# Altium PCB JPPCCCC.PCBDOC (part 2 of 2)
Units mm, origin at the board's own origin, x right, y up, seen from the top; angles counter-clockwise.
Board outline 108.84 x 93.85 mm, 2 copper layers (Top Layer, Bottom Layer); 131 components, 71 nets, 555 pads, 84 vias.
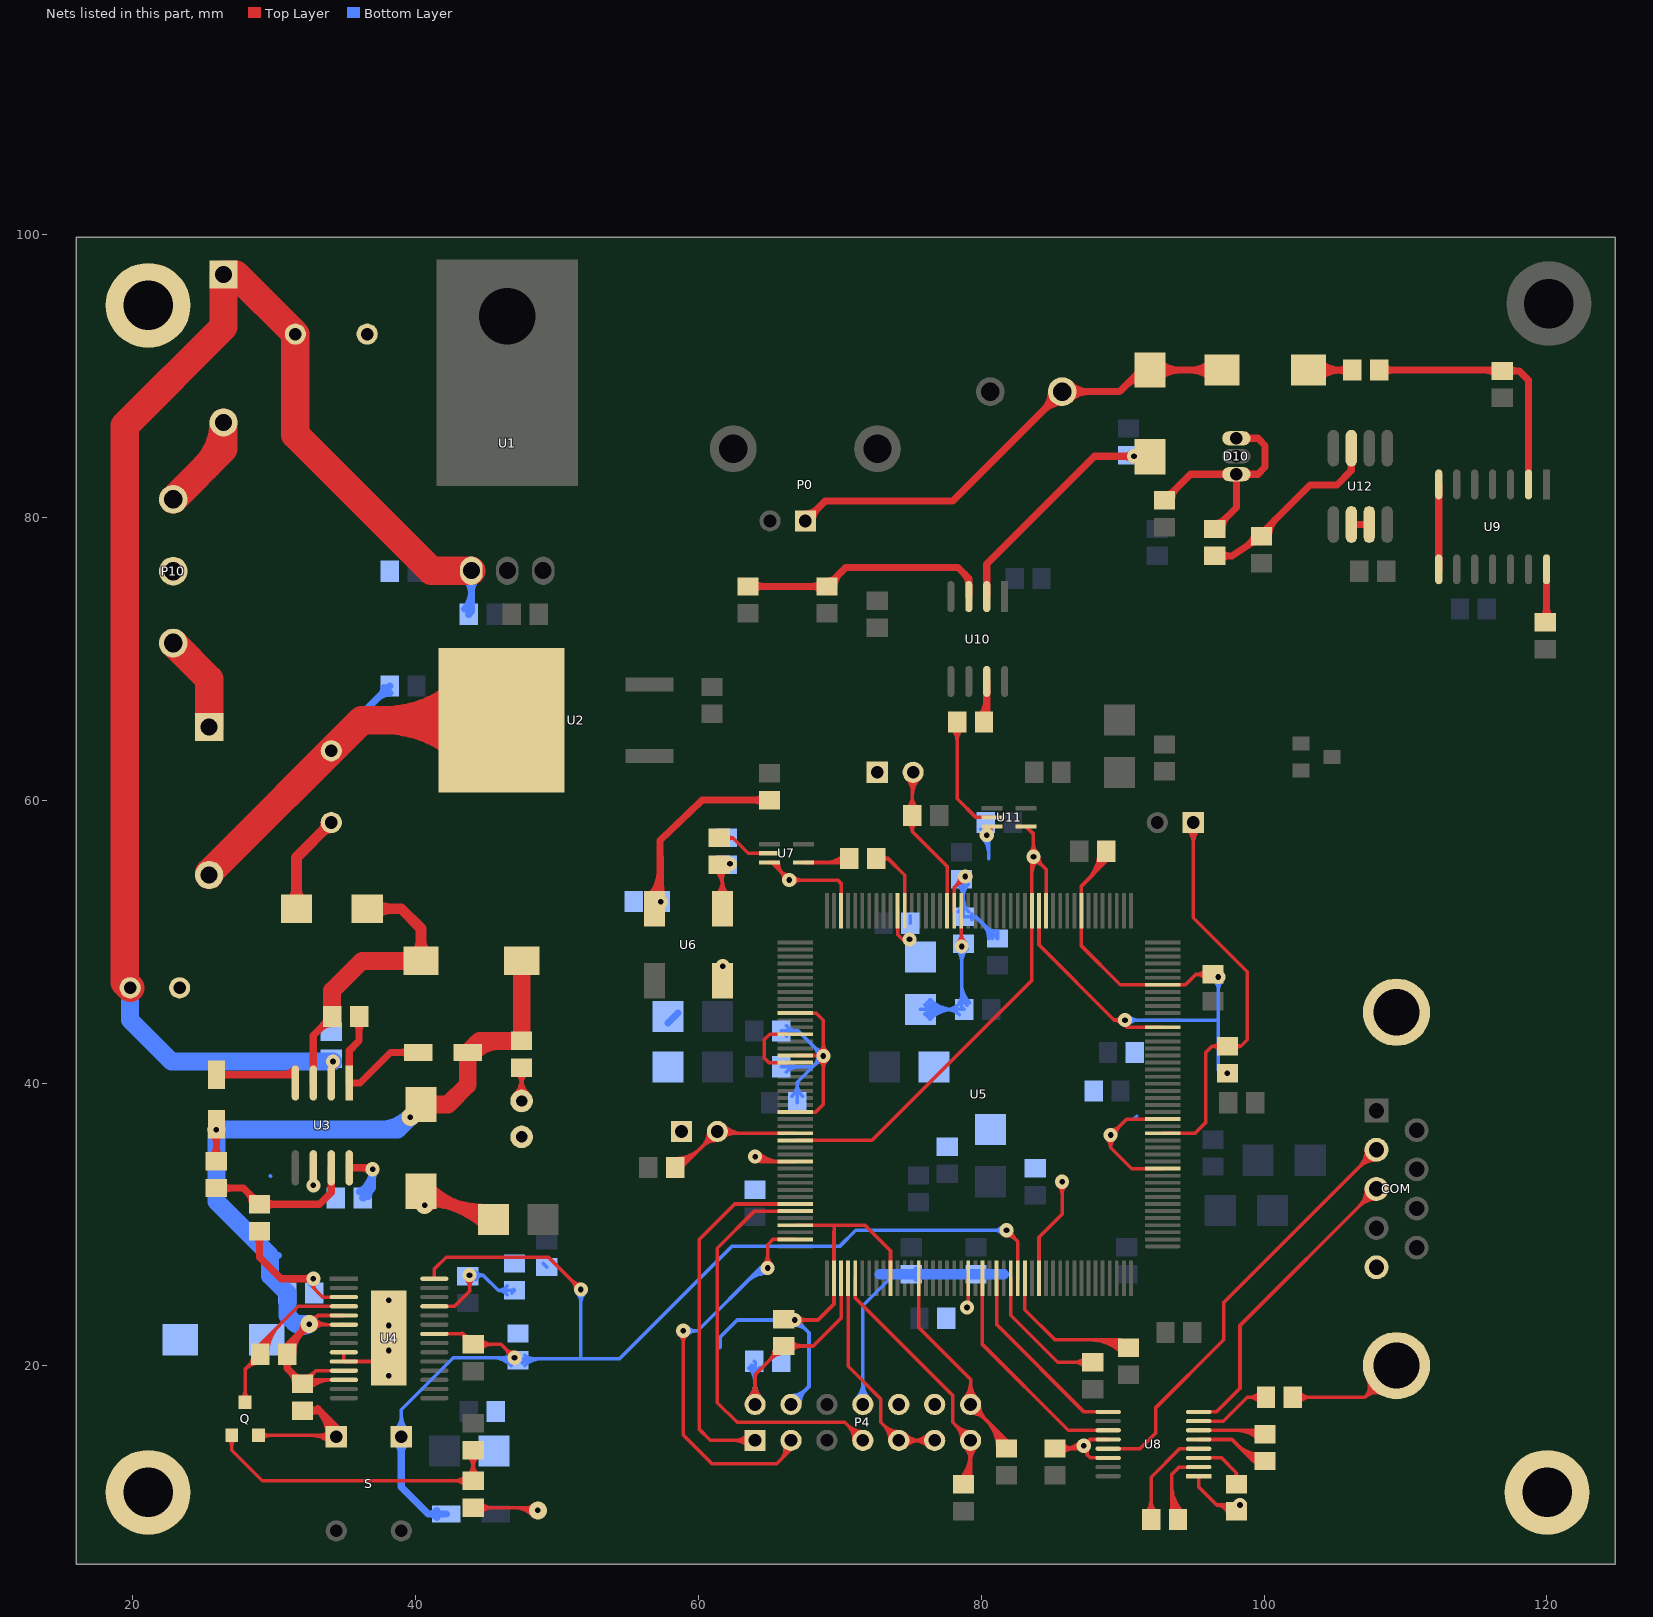
[diagram p2: the nets of this part, all layers, seen from the top]

## Via types
v1: diameter 1, hole 0.4, Top Layer to Bottom Layer, 61 vias
v2: diameter 1.27, hole 0.4, Top Layer to Bottom Layer, 23 vias

## Nets (pads, with @x,y where several pads share a name; then routed paths per layer and width w, separated by ;. In a path a pad name is that pad's centre, name@x,y a point inside that pad or via, vN(x,y) a via of type N, cw(c..) or ccw(c..) an arc to the next point about the centre after c; other vN are vias at no path point) (continued)
DGND: C1.2 C2.1 C20.2 C21.1 C23.2 C24.1 C25.2 C26.1 C27.1 C28.2 C29.1 C30.2 C31.2 C32.2 C33.1 C34.1 C52.2 C53.1 C54.2 C60.2 C61.2 C62.1 C63.1 C64.1 C65.1 C66.1 C67.1 C68.1 C69.1 C70.1 C71.2 C72.1 C73.1 C74.1 C75.1 C76.1 C78.1 C79.2 C80.2 C81.2 C83.1 C85.2 C105.1 COM.5 COM.10 COM.11 D5.1 DS.2 L5.1 P2.1 P3.1 P4.4 P4.8 P4.10 P4.12 P10.2 pad.0 pad.2 pad.@21.082,11.049 pad.@21.082,94.996 pad.@120.015,11.049 Q.2 R2.1 R5.1 R8.2 R26.2 R54.1 S.2 U3.6 U4.3 U4.9 U4.10 U5.12 U5.19 U5.32 U5.38 U5.52 U5.58 U5.70 U5.78 U5.86 U5.99 U5.105 U5.113 U5.120 U5.129 U5.134 U5.142 U5.153 U5.163 U6.4 U7.3 U8.1 U8.12 U8.14 U11.3 | length 375.2
  Top Layer w0.254: Q.2@28.89,15.081 34.294,15.081 S.2@34.389,14.986 ; R2.1@28.956,29.337 R2.1@28.956,29.53 R2.1@29.398,29.53 ; Q.2@29.118,14.853 cw(c29.67,14.301) 29.67,15.081 cw(c29.67,15.861) Q.2@29.118,15.309 ; v1@32.584,25.836 cw(c32.412,25.527) 32.766,25.527 ; U3.6@32.639,34.29 32.766,34.163 U3.6@32.766,34.005 ; 32.656,15.081 cw(c32.656,13.253) S.2@33.948,14.545 ; v1(32.766,26.162) 32.766,25.527 ; v1@32.948,25.836 ccw(c33.12,25.527) 32.766,25.527 ; 33.114,15.081 ccw(c33.114,16.261) S.2@33.948,15.427 ; 33.269,15.081 cw(c33.269,13.866) S.2@34.128,14.725 ; S.2@34.23,14.827 S.2@34.389,14.986 ; S.2@34.389,15.649 S.2@34.389,14.986 ; U4.9@34.925,20.962 U4.10@34.925,20.312 pad.0@37.33,20.312 ; U4.3@34.925,24.862 33.431,24.862 32.766,25.527 ; C23.2@40.167,32.011 ccw(c41.623,33.343) 41.623,31.369 ; C23.2@40.354,32.182 ccw(c42.2,33.87) 42.2,31.369 ; C23.2@40.542,32.353 ccw(c42.776,34.397) 42.776,31.369 ; v2(40.64,31.369) C30.2@44.506,31.369 ; C23.2@40.72,31.369 cw(c40.72,25.551) C30.2@44.834,29.665 ; C23.2@40.729,32.525 ccw(c43.353,34.924) 43.353,31.369 ; C23.2@40.917,32.696 ccw(c43.929,35.452) 43.929,31.369 ; v2@40.999,31.01 cw(c41.866,30.143) 41.866,31.369 cw(c41.866,32.595) C23.2@40.999,31.728 ; C23.2@41.104,32.868 ccw(c44.506,35.979) C30.2@44.506,31.369 ; C23.2@41.333,31.369 cw(c41.333,26.164) C30.2@45.014,29.845 ; 41.947,31.369 cw(c41.947,26.778) C30.2@45.193,30.024 ; 42.56,31.369 cw(c42.56,27.391) C30.2@45.373,30.204 ; 43.173,31.369 cw(c43.173,28.004) C30.2@45.552,30.383 ; 43.786,31.369 cw(c43.786,28.617) C30.2@45.732,30.563 ; R5.1@44.069,9.972 48.448,9.972 v2(48.641,9.779) ; 44.399,31.369 cw(c44.399,29.23) C30.2@45.912,30.743 ; R5.1@44.539,9.602 cw(c45.432,8.709) 45.432,9.972 cw(c45.432,11.235) R5.1@44.539,10.342 ; C30.2@45.522,30.353 C30.2@44.506,31.369 ; 46.949,9.972 cw(c46.949,8.087) v2@48.282,9.42 ; 47.562,9.972 cw(c47.562,8.7) v2@48.461,9.599 ; 47.88,9.972 ccw(c47.88,10.54) v2@48.282,10.138 ; v1@63.913,34.703 ccw(c64.527,35.317) 64.527,34.448 ; v1(64.008,34.798) 64.358,34.448 U5.120@66.837,34.448 ; v1@64.092,34.882 ccw(c65.14,35.93) 65.14,34.448 ; v1@64.272,35.062 ccw(c65.754,36.544) U5.120@65.754,34.448 ; U7.3@65.024,55.596 65.181,55.596 v1(66.421,54.356) 69.85,54.356 70.087,54.119 U5.86@70.087,52.198 ; U7.3@65.393,55.596 ccw(c65.905,55.596) 65.543,55.234 ; U7.3@65.647,55.596 ccw(c66.772,55.596) 65.976,54.801 ; v1@66.048,54.356 ccw(c65.148,54.356) 65.784,54.993 ccw(c66.421,55.629) v1@66.421,54.729 ; R26.2@66.33,23.492 ccw(c66.937,24.099) v1@66.937,23.241 ; R26.2@66.51,22.932 cw(c67.255,22.187) v1@67.255,23.241 ; R26.2@66.51,23.672 ccw(c67.55,24.712) 67.55,23.241 ; R26.2@66.631,23.122 cw(c66.802,23.059) v1(66.802,23.241) ; R26.2@66.659,23.367 ccw(c66.802,23.385) v1(66.802,23.241) ; v1@66.685,54.092 cw(c67.321,53.456) 67.321,54.356 cw(c67.321,55.256) v1@66.685,54.62 ; U5.129@66.837,29.948 71.779,29.948 73.587,28.14 U5.142@73.587,26.198 ; U5.113@66.837,37.948 68.301,37.948 68.834,38.481 68.834,44.45 68.336,44.948 U5.99@66.837,44.948 ; U5.105@66.837,41.948 v1@68.796,41.948 ; v1@67.066,22.977 cw(c67.702,22.341) 67.702,23.241 cw(c67.702,24.141) v1@67.066,23.505 ; v1@68.57,41.646 cw(c67.934,41.01) 68.834,41.01 cw(c69.734,41.01) v1@69.098,41.646 ; v1@68.57,42.174 ccw(c67.934,42.81) 68.834,42.81 ccw(c69.734,42.81) v1@69.098,42.174 ; 69.596,29.948 69.587,29.219 69.587,24.375 68.453,23.241 v1(66.802,23.241) ; U5.78@74.087,52.198 74.087,50.5 74.422,50.165 ; U5.70@78.087,52.198 78.087,53.83 v1(78.867,54.61) ; v1@78.494,54.61 cw(c77.594,54.61) 78.23,53.973 cw(c78.867,53.337) v1@78.867,54.237 ; v1(78.994,24.13) 79.087,24.223 U5.153@79.087,26.198 ; v1(80.391,57.531) 80.391,57.755 U11.3@80.772,58.136 ccw(c81.019,57.888) v1@80.715,57.715 ; v1@80.391,57.904 ccw(c80.391,58.264) U11.3@80.645,58.009 ; U5.163@84.087,26.198 84.087,29.096 85.725,30.734 v1(85.725,33.02) ; U5.58@84.087,52.198 84.087,49.771 89.408,44.45 ; C83.1@85.217,14.158 87.056,14.158 v1(87.249,14.351) ; v1@85.461,32.756 cw(c84.825,32.12) 85.725,32.12 cw(c86.625,32.12) v1@85.989,32.756 ; C83.1@85.687,13.788 cw(c86.58,12.895) 86.58,14.158 cw(c86.58,15.421) C83.1@85.687,14.528 ; C83.1@85.883,14.158 ccw(c85.883,15.717) v1@86.985,14.615 ; 86.496,14.158 ccw(c86.496,15.104) v1@87.165,14.435 ; v1@87.217,13.979 cw(c87.19,13.667) 87.503,13.667 ; v1@87.357,14.708 ccw(c87.453,15.029) 87.69,14.792 ; 87.516,54.369 ccw(c85.597,56.288) C69.1@88.311,56.288 ; v1@87.606,14.459 cw(c87.927,14.555) 87.69,14.792 ; 87.95,54.803 ccw(c86.465,56.288) C69.1@88.565,56.288 ; 88.383,55.236 ccw(c87.332,56.288) C69.1@88.819,56.288 ; C69.1@88.834,56.388 88.834,55.687 87.087,53.94 87.087,49.692 89.831,46.948 U5.38@92.837,46.948 94.446,46.948 95.184,47.686 ; v1@88.893,36.056 cw(c88.281,35.433) 89.154,35.433 ; U8.14@88.977,13.492 87.727,13.492 87.503,13.716 87.503,14.351 87.503,14.605 87.69,14.792 ; U8.12@88.977,14.792 87.69,14.792 ; v1@89.154,36.695 ccw(c89.154,37.595) 89.791,36.959 ccw(c90.427,36.322) v1@89.527,36.322 ; v1@89.415,36.056 ccw(c90.027,35.433) 89.154,35.433 ; v1@89.875,44.221 ccw(c89.408,43.858) 89.408,44.45 ; v1@89.875,44.679 cw(c89.408,45.042) 89.408,44.45 ; v1@89.98,44.26 90.291,43.948 U5.32@92.837,43.948 ; v1(90.17,44.45) 89.408,44.45 ; U5.12@92.837,33.948 90.639,33.948 89.154,35.433 ; U5.19@92.837,37.448 90.28,37.448 v1(89.154,36.322) 89.154,35.433 ; U8.1@95.377,12.192 95.377,11.43 96.647,10.16 ; 95.42,47.686 cw(c95.42,46.144) C64.1@96.51,47.234 ; C64.1@95.889,47.353 ccw(c95.184,46.772) 95.184,47.686 ; C64.1@95.889,48.019 cw(c95.184,48.6) 95.184,47.686 ; C64.1@96.033,47.686 cw(c96.033,46.757) C64.1@96.69,47.414 ; C64.1@96.393,47.686 95.184,47.686 ; 96.988,10.16 cw(c96.988,9.431) C81.2@97.686,9.641 ; C81.2@97.33,10.16 cw(c97.33,9.534) C81.2@97.93,9.714 ; R54.1@97.409,40.574 v1(97.409,40.706) ; C81.2@97.443,9.568 ccw(c96.647,9.329) 96.647,10.16 ; C81.2@98.034,9.896 ccw(c97.398,9.26) 97.398,10.16 ccw(c97.398,11.06) v1@98.034,10.424 ; v1(98.298,10.16) 96.647,10.16 ; C85.2@102.042,17.78 107.135,17.78 ; C85.2@102.412,17.41 cw(c103.305,16.517) 103.305,17.78 cw(c103.305,19.043) C85.2@102.412,18.15 ; COM.11@107.346,19.032 cw(c106.361,18.554) 107.135,17.78 ; COM.11@107.574,19.143 cw(c106.701,18.719) 107.387,18.032 cw(c108.074,17.346) COM.11@108.498,18.219 ; COM.11@107.802,19.254 cw(c107.04,18.884) 107.639,18.284 cw(c108.239,17.685) COM.11@108.609,18.447 ; COM.11@108.387,17.991 ccw(c107.909,17.006) 107.135,17.78 ; COM.11@109.372,20.017 107.135,17.78
  Top Layer w0.508: R2.1@28.676,29.25 cw(c28,28.574) 28.956,28.574 cw(c29.912,28.574) R2.1@29.236,29.25 ; R2.1@28.956,29.53 28.956,27.686 30.48,26.162 v1(32.766,26.162) ; C27.1@32.004,16.83 33.208,16.83 S.2@34.389,15.649 ; C27.1@32.384,16.55 cw(c33.06,15.874) 33.06,16.83 ; C27.1@32.384,17.11 ccw(c33.06,17.786) 33.06,16.83 ; v1@32.592,25.988 ccw(c32.172,25.568) 32.172,26.162 ccw(c32.172,26.756) v1@32.592,26.336 ; 33.073,16.965 cw(c31.095,14.986) S.2@33.893,14.986 ; 33.941,16.097 cw(c32.829,14.986) S.2@34.401,14.986
  Top Layer w0.762: D5.1@31.138,52.762 ccw(c30.082,53.818) 31.576,53.818 ccw(c33.07,53.818) D5.1@32.014,52.762 ; D5.1@31.576,52.324 31.576,55.96 C2.1@34.036,58.42 ; C2.1@33.667,58.42 cw(c32.776,58.42) 33.406,57.79 cw(c34.036,57.16) C2.1@34.036,58.051
  Bottom Layer w0.254: 29.718,33.425 29.742,33.401 ; C26.1@32.512,25.781 C26.1@32.893,25.4 ; C31.2@49.027,27.239 C31.2@49.276,26.99 ; 61.468,21.27 61.534,21.336 61.534,22.037 62.738,23.241 66.929,23.241 67.818,22.352 67.818,18.542 P4.4@66.548,17.272 ; C68.1@65.847,41.148 68.072,41.148 ; C62.1@65.847,43.688 67.056,43.688 ; C68.1@66.217,40.778 cw(c67.11,39.885) 67.11,41.148 cw(c67.11,42.411) C68.1@66.217,41.518 ; C62.1@66.228,43.33 cw(c67.056,42.552) 67.056,43.688 ; C62.1@66.228,44.046 ccw(c67.056,44.824) 67.056,43.688 ; v1@66.538,22.977 ccw(c65.902,22.341) 65.902,23.241 ccw(c65.902,24.141) v1@66.538,23.505 ; P4.4@66.548,17.641 ccw(c66.548,18.532) 67.178,17.902 ccw(c67.808,17.272) P4.4@66.917,17.272 ; P4.4@66.548,17.895 ccw(c66.548,19.399) 67.612,18.336 ccw(c68.675,17.272) P4.4@67.171,17.272 ; C72.1@66.62,39.078 ccw(c65.727,39.971) 66.99,39.971 ccw(c68.253,39.971) C72.1@67.36,39.078 ; v1@66.802,22.868 cw(c66.802,21.661) 67.656,22.514 ; v1@66.802,23.122 cw(c66.802,22.528) 67.222,22.948 ; C72.1@66.99,38.608 66.99,40.066 v1(68.834,41.91) 67.056,43.688 ; v1@67.175,23.241 ccw(c67.769,23.241) 67.349,22.821 ; v1@68.834,41.537 ccw(c68.834,40.637) 68.197,41.273 ccw(c67.561,41.91) 68.461,41.91 ccw(c67.561,41.91) 68.197,42.547 ccw(c68.834,43.183) v1@68.834,42.283 ; P4.8@71.187,17.713 ccw(c70.124,18.776) 71.628,18.776 ccw(c73.132,18.776) P4.8@72.069,17.713 ; P4.8@71.367,17.533 ccw(c70.737,18.163) 71.628,18.163 ccw(c72.519,18.163) P4.8@71.889,17.533 ; P4.8@71.628,17.272 71.628,24.257 73.853,26.482 ; C73.1@74.991,51.308 C73.1@74.991,51.816 ; C63.1@78.343,54.052 cw(c77.385,53.094) 78.74,53.094 ; C33.1@78.37,52.12 ccw(c77.477,53.013) 78.74,53.013 ccw(c80.003,53.013) C33.1@79.11,52.12 ; C63.1@78.523,54.232 cw(c77.998,53.707) 78.74,53.707 ; C63.1@78.603,54.346 cw(c78.273,54.016) 78.74,54.016 cw(c79.461,54.016) C63.1@78.951,54.526 ; 78.74,53.225 cw(c79.91,53.225) C63.1@79.083,54.052 ; 78.74,53.403 cw(c80.074,53.403) C63.1@79.131,54.346 ; C63.1@79.248,54.61 v1(78.867,54.61) 78.74,54.483 C33.1@78.74,51.75 79.629,51.75 ; C33.1@79.322,51.546 cw(c79.629,51.416) 79.629,51.75 ; C33.1@79.322,51.954 ccw(c79.629,52.084) 79.629,51.75 ; C105.1@79.96,57.95 cw(c78.613,56.603) 80.518,56.603 ; 80.089,51.29 cw(c79.026,50.226) C74.1@80.53,50.226 ; v1@80.127,57.267 cw(c79.184,56.324) 80.518,56.324 ; C105.1@80.14,58.13 cw(c79.227,57.217) v1@80.518,57.217 ; v1@80.307,57.447 cw(c79.797,56.937) 80.518,56.937 cw(c80.985,56.937) v1@80.655,57.267 ; 80.331,51.048 ccw(c81.053,51.77) C74.1@81.053,50.749 ; 80.518,55.88 C105.1@80.518,57.912 ; v1@80.518,57.511 cw(c81.139,57.511) C105.1@80.7,57.95 ; C74.1@80.523,50.856 cw(c79.893,50.226) C74.1@80.784,50.226 ; C74.1@81.153,50.734 C74.1@81.153,50.226 79.629,51.75 ; v1(90.17,44.45) 96.647,44.45 96.774,44.577 ; v1@90.434,44.186 cw(c91.07,43.55) 91.07,44.45 cw(c91.07,45.35) v1@90.434,44.714 ; 90.805,37.465 90.998,37.658 ; v1@96.51,47.234 cw(c95.874,46.598) 96.774,46.598 cw(c97.674,46.598) v1@97.038,47.234 ; 96.774,40.894 v1(96.774,47.498) ; 96.901,40.513 v1@97.155,40.513 ; v1(98.298,10.16) v1@98.503,10.365
  Bottom Layer w0.5: C60.2@57.841,44.252 C60.2@58.557,44.948
  Bottom Layer w0.508: C67.1@75.057,26.482 76.581,26.482 ; C67.1@75.437,26.202 cw(c76.113,25.526) 76.113,26.482 cw(c76.113,27.438) C67.1@75.437,26.762
  Bottom Layer w0.762: 72.837,26.482 81.595,26.482
  other v1: 38.1,19.304 38.1,21.082 38.1,22.86 38.1,24.638 32.766,32.766 61.722,48.26 74.93,50.165
EMU0: P4.13 R52.1 U5.137 | length 30.5
  Top Layer w0.254: U5.137@71.087,26.198 71.087,24.798 77.978,17.907 77.978,16.002 P4.13@79.248,14.732 79.248,12.126 R52.1@78.74,11.618 ; R52.1@78.47,11.988 ccw(c76.592,13.866) 79.248,13.866 ; P4.13@78.625,14.732 ccw(c77.121,14.732) 78.184,15.796 ccw(c79.248,16.859) P4.13@79.248,15.355 ; R52.1@78.65,11.808 ccw(c77.206,13.252) 79.248,13.252 ; P4.13@78.807,14.291 cw(c77.744,13.228) 79.248,13.228 cw(c80.752,13.228) P4.13@79.689,14.291 ; R52.1@78.829,11.629 ccw(c77.819,12.639) 79.248,12.639 ; P4.13@78.879,14.732 ccw(c77.988,14.732) 78.618,15.362 ccw(c79.248,15.992) P4.13@79.248,15.101 ; P4.13@78.987,14.471 cw(c78.357,13.841) 79.248,13.841 cw(c80.139,13.841) P4.13@79.509,14.471
EMU1: P4.14 R53.2 U5.146 | length 28.3
  Top Layer w0.254: U5.146@75.587,26.198 75.587,22.711 79.248,19.05 P4.14@79.248,17.272 81.788,14.732 R53.2@81.788,14.158 ; P4.14@78.807,17.713 ccw(c77.744,18.776) 79.248,18.776 ccw(c80.752,18.776) P4.14@79.689,17.713 ; P4.14@78.987,17.533 ccw(c78.357,18.163) 79.248,18.163 ccw(c80.139,18.163) P4.14@79.509,17.533 ; P4.14@79.248,16.649 cw(c79.248,15.145) 80.312,16.208 cw(c81.375,17.272) P4.14@79.871,17.272 ; P4.14@79.248,16.903 cw(c79.248,16.012) 79.878,16.642 cw(c80.508,17.272) P4.14@79.617,17.272 ; 80.319,16.201 cw(c78.275,14.158) R53.2@81.165,14.158 ; 80.752,15.768 cw(c79.142,14.158) R53.2@81.419,14.158 ; 81.186,15.334 cw(c80.01,14.158) R53.2@81.673,14.158 ; 81.619,14.901 cw(c80.877,14.158) R53.2@81.927,14.158
"INPUT A0": U5.57 U5.59 U5.117 U11.4 | length 41.5
  Top Layer w0.254: U5.117@66.837,35.948 72.27,35.948 83.587,47.265 83.587,55.901 v1(83.693,56.007) ; U11.4@83.172,58.136 83.693,57.615 v1(83.693,56.007) ; v1@83.429,55.743 cw(c83.048,55.362) 83.587,55.362 ; v1@83.429,56.271 ccw(c82.793,56.907) 83.693,56.907 ccw(c84.593,56.907) v1@83.957,56.271 ; 83.587,54.851 cw(c84.849,54.851) v1@83.957,55.743 ; 83.587,55.464 cw(c84.236,55.464) v1@83.777,55.923 ; v1@83.693,55.634 cw(c83.693,54.734) 84.33,55.37 cw(c84.966,56.007) v1@84.066,56.007 ; U5.57@84.587,52.198 84.587,55.113 v1(83.693,56.007)
NetC22_1: C22.1 D4.2 U3.1 | length 13.6
  Top Layer w0.508: C22.1@35.722,44.324 cw(c35.046,43.648) 36.002,43.648 cw(c36.958,43.648) C22.1@36.282,44.324 ; C22.1@36.002,44.704 36.002,42.987 35.306,42.291 U3.1@35.306,40.005 36.068,40.005 38.227,42.164 D4.2@40.188,42.164 ; D4.2@39.543,41.919 ccw(c38.953,41.329) 38.953,42.164 ccw(c38.953,42.999) D4.2@39.543,42.409
NetC22_2: C22.2 D5.2 L1.1 U3.3 | length 27.1
  Top Layer w0.508: U3.3@32.766,40.005 32.766,43.368 C22.2@34.102,44.704 ; 33.255,43.857 cw(c34.102,43.011) C22.2@34.102,44.208 ; C22.2@33.497,44.099 ccw(c32.991,44.604) C22.2@33.706,44.604
  Top Layer w0.762: D5.2@36.576,52.324 38.989,52.324 40.386,50.927 L1.1@40.386,48.641 ; D5.2@37.114,51.886 cw(c38.17,50.83) 38.17,52.324 cw(c38.17,53.818) D5.2@37.114,52.762 ; L1.1@39.948,49.079 ccw(c38.892,50.135) 40.386,50.135 ccw(c41.88,50.135) L1.1@40.824,49.079
  Top Layer w1.27: C22.2@34.102,44.704 34.102,46.548 36.195,48.641 L1.1@40.386,48.641
NetC24_2: C24.2 U3.8 | length 10.2
  Top Layer w0.254: v1@36.861,34.005 v1(36.957,33.909)
  Top Layer w0.508: U3.8@35.306,34.005 v1@36.861,34.005 ; 36.131,34.005 cw(c36.131,33.083) v1@36.783,33.735
  Bottom Layer w0.508: C24.2@36.053,32.317 ccw(c35.103,33.909) v1(36.957,33.909) 36.957,32.578 ; C24.2@36.256,31.877 36.957,32.578 ; C24.2@36.313,31.881 ccw(c35.637,33.014) 36.957,33.014 ; C24.2@36.316,32.368 ccw(c36.43,33.105) 36.957,32.578 ; C24.2@36.652,31.977 cw(c37.367,31.977) C24.2@36.861,32.482 ; v1@36.783,33.735 cw(c36.363,33.315) 36.957,33.315 cw(c37.551,33.315) v1@37.131,33.735
NetC78_2: C78.2 R50.1 U6.5 | length 11.1
  Top Layer w0.254: R50.1@61.198,55.068 cw(c59.996,53.866) 61.696,53.866 ; U6.5@61.255,53.265 ccw(c60.192,54.328) 61.696,54.328 ccw(c63.2,54.328) U6.5@62.137,53.265 ; R50.1@61.378,55.248 cw(c60.61,54.48) 61.696,54.48 ; U6.5@61.435,53.085 ccw(c60.805,53.715) 61.696,53.715 ccw(c62.587,53.715) U6.5@61.957,53.085 ; U6.5@61.696,52.324 R50.1@61.696,54.965 ; 61.696,54.484 cw(c62.522,54.484) R50.1@61.938,55.068 ; R50.1@61.86,55.45 cw(c61.287,55.374) R50.1@61.696,54.965 ; R50.1@62.181,55.129 ccw(c62.105,54.556) R50.1@61.696,54.965 ; v1(62.23,55.499) R50.1@61.696,54.965
NetC79_1: C79.1 L4.1 U6.8 | length 18.9
  Top Layer w0.508: U6.8@56.54,53.17 ccw(c54.6,55.057) 57.306,55.095 ; U6.8@56.905,52.816 ccw(c55.843,53.848) 57.323,53.868 ; U6.8@57.162,53.003 ccw(c56.736,53.417) 57.33,53.426 ccw(c57.923,53.434) U6.8@57.509,53.008 ; v1(57.338,52.832) 57.277,57.15 60.198,59.944 60.264,60.01 L4.1@65.024,60.01 ; L4.1@64.644,59.73 ccw(c63.968,59.054) 63.968,60.01 ccw(c63.968,60.966) L4.1@64.644,60.29
NetC81_1: C81.1 U8.3 | length 4.8
  Top Layer w0.254: U8.3@95.377,13.492 96.998,13.492 98.044,12.446 ; C81.1@97.819,12.09 ccw(c97.65,12.446) 98.044,12.446 ; C81.1@98.044,11.618 98.044,12.446 ; C81.1@98.269,12.09 cw(c98.438,12.446) 98.044,12.446
NetC82_1: C82.1 U8.4 | length 9.2
  Top Layer w0.254: C82.1@91.644,9.614 ccw(c90.751,10.507) 92.014,10.507 ccw(c93.277,10.507) C82.1@92.384,9.614 ; C82.1@92.014,9.144 92.014,12.131 94.025,14.142 U8.4@95.377,14.142
NetC82_2: C82.2 U8.2 | length 11.3
  Top Layer w0.254: C82.2@93.472,9.734 ccw(c94.404,9.734) C82.2@93.745,9.075 ; 93.472,10.347 ccw(c95.017,10.347) C82.2@93.925,9.255 ; 93.472,10.961 ccw(c95.631,10.961) C82.2@94.104,9.434 ; 93.472,11.574 ccw(c96.244,11.574) C82.2@94.284,9.614 ; C82.2@93.914,9.144 93.472,9.586 93.472,12.319 93.995,12.842 U8.2@95.377,12.842
NetC84_1: C84.1 U8.6 | length 8.8
  Top Layer w0.254: U8.6@95.377,15.442 99.808,15.442 C84.1@100.076,15.174 ; 98.066,15.442 cw(c98.066,13.264) C84.1@99.606,14.804 ; 98.68,15.442 cw(c98.68,13.878) C84.1@99.786,14.984 ; 99.293,15.442 cw(c99.293,14.491) C84.1@99.965,15.163 ; C84.1@99.36,15.442 ccw(c99.36,15.79) C84.1@99.606,15.544
NetC84_2: C84.2 U8.5 | length 11.7
  Top Layer w0.254: U8.5@95.377,14.792 97.73,14.792 99.248,13.274 ; 98.094,14.428 ccw(c99.661,15.995) C84.2@99.916,13.794 ; 98.466,14.056 ccw(c99.738,15.329) C84.2@99.945,13.541 ; 98.837,13.685 ccw(c99.815,14.663) C84.2@99.974,13.289 ; 99.209,13.313 ccw(c99.892,13.997) C84.2@100.003,13.037 ; C84.2@99.48,13.107 ccw(c99.248,13.029) 99.248,13.274 ; C84.2@99.48,13.441 cw(c99.248,13.519) 99.248,13.274 ; C84.2@100.076,13.274 99.248,13.274
NetC85_1: C85.1 U8.7 | length 7.4
  Top Layer w0.254: U8.7@95.377,16.092 97.118,16.092 98.806,17.78 C85.1@100.142,17.78 ; C85.1@99.772,17.41 ccw(c98.879,16.517) 98.879,17.78 ccw(c98.879,19.043) C85.1@99.772,18.15
NetC100_1: C100.1 C106.1 P0.1 P6.2 | length 49.2
  Top Layer w0.508: P0.1@67.564,79.756 68.961,81.153 77.978,81.153 P6.2@85.725,88.9 89.789,88.9 C100.1@91.313,90.424 ; P0.1@67.564,80.252 ccw(c67.564,81.449) 68.411,80.603 ccw(c69.257,79.756) P0.1@68.06,79.756 ; P6.2@84.963,88.9 cw(c83.123,88.9) 84.424,87.599 cw(c85.725,86.298) P6.2@85.725,88.138 ; P6.2@86.264,88.361 cw(c87.565,87.06) 87.565,88.9 cw(c87.565,90.74) P6.2@86.264,89.439 ; 90.179,89.29 cw(c91.755,87.714) C100.1@91.923,89.937 ; C100.1@91.948,90.424 C106.1@97.028,90.424 ; C100.1@92.546,89.826 cw(c93.99,88.382) 93.99,90.424 cw(c93.99,92.466) C100.1@92.546,91.022 ; C106.1@96.28,89.826 ccw(c94.836,88.382) 94.836,90.424 ccw(c94.836,92.466) C106.1@96.28,91.022
NetC100_2: C100.2 R100.1 U10.2 | length 20.9
  Top Layer w0.508: U10.2@80.391,74.403 80.391,76.708 88.011,84.328 v1(90.805,84.328) ; 89.848,84.328 cw(c89.848,82.204) C100.2@91.35,83.706 ; 89.963,84.328 ccw(c89.963,86.289) C100.2@91.35,84.902 ; v1@90.631,84.154 ccw(c90.211,83.734) 90.211,84.328 ccw(c90.211,84.922) v1@90.631,84.502 ; C100.2@91.133,84.079 ccw(c90.805,83.988) v1(90.805,84.328) ; C100.2@91.146,84.573 cw(c90.805,84.688) v1(90.805,84.328)
NetC106_2: C106.2 R106.1 | length 7.8
  Top Layer w0.508: C106.2@103.148,90.424 R106.1@106.238,90.424 ; C106.2@103.896,89.826 cw(c105.34,88.382) 105.34,90.424 cw(c105.34,92.466) C106.2@103.896,91.022 ; R106.1@105.958,90.144 ccw(c105.282,89.468) 105.282,90.424 ccw(c105.282,91.38) R106.1@105.958,90.704
NetD1_1: D1.1 P10.3 pad.3 | length 10.5
  Top Layer w2: pad.3@22.86,81.28 26.416,84.836 D1.1@26.416,86.718 cw(c21.872,86.718) 25.085,83.505
NetD2_2: D2.2 P10.1 pad.1 | length 7
  Top Layer w2: pad.1@22.86,71.12 25.4,68.58 D2.2@25.4,65.174
NetD3_2: D3.2 U3.4 | length 8.6
  Top Layer w0.508: D3.2@25.908,40.584 31.44,40.584 31.496,40.528 U3.4@31.496,40.005 ; D3.2@26.153,40.339 cw(c26.743,39.749) 26.743,40.584 cw(c26.743,41.419) D3.2@26.153,40.829 ; 30.489,40.584 ccw(c30.489,42.002) U3.4@31.492,40.999
NetD10_1: D10.1 D10.3 R108.1 R110.2 | length 23.1
  Top Layer w0.508: R108.1@92.964,81.214 94.808,83.058 99.568,83.058 100.076,83.566 100.076,85.09 99.568,85.598 D10.3@98.044,85.598 ; R108.1@93.064,81.61 ccw(c93.064,82.325) R108.1@93.569,81.819 ; R108.1@93.46,81.214 cw(c94.657,81.214) 93.811,82.061 ; R110.2@96.52,79.182 98.044,80.706 D10.1@98.044,83.058 ; R110.2@96.62,79.578 ccw(c96.62,80.293) R110.2@97.125,79.787 ; R110.2@97.016,79.182 cw(c98.213,79.182) 97.367,80.029 ; D10.1@97.37,82.884 ccw(c96.95,82.464) 96.95,83.058 ccw(c96.95,83.652) D10.1@97.37,83.232 ; D10.1@97.87,82.884 cw(c97.45,82.464) 98.044,82.464 cw(c98.638,82.464) D10.1@98.218,82.884 ; D10.1@98.718,82.884 cw(c99.138,82.464) 99.138,83.058 cw(c99.138,83.652) D10.1@98.718,83.232 ; D10.3@98.718,85.424 cw(c99.138,85.004) 99.138,85.598 cw(c99.138,86.192) D10.3@98.718,85.772
NetDS_1: DS.1 R3.1 | length 8.5
  Top Layer w0.254: DS.1@47.022,39.211 ccw(c45.873,40.36) 47.498,40.36 ccw(c49.123,40.36) DS.1@47.974,39.211 ; R3.1@47.128,40.717 cw(c46.235,39.824) 47.498,39.824 cw(c48.761,39.824) R3.1@47.868,40.717 ; DS.1@47.202,39.031 ccw(c46.486,39.747) 47.498,39.747 ccw(c48.51,39.747) DS.1@47.794,39.031 ; DS.1@47.498,38.735 R3.1@47.498,41.087
NetQ_1: Q.1 R4.1 R5.2 | length 28.5
  Top Layer w0.254: Q.1@26.762,14.828 cw(c26.21,14.276) 26.99,14.276 cw(c27.77,14.276) Q.1@27.218,14.828 ; Q.1@26.99,15.081 26.99,14.031 29.149,11.872 R5.2@44.069,11.872 R4.1@44.069,14.036 ; R5.2@43.599,11.502 ccw(c42.706,10.609) 42.706,11.872 ccw(c42.706,13.135) R5.2@43.599,12.242 ; R5.2@43.699,12.242 ccw(c42.806,13.135) 44.069,13.135 ccw(c45.332,13.135) R5.2@44.439,12.242 ; R4.1@43.699,13.666 cw(c42.806,12.773) 44.069,12.773 cw(c45.332,12.773) R4.1@44.439,13.666 ; R5.2@44.003,11.43 R5.2@44.069,11.496
NetQ_3: Q.3 R6.1 U4.4 | length 19.7
  Top Layer w0.254: Q.3@27.712,17.684 ccw(c27.16,18.236) 27.94,18.236 ccw(c28.72,18.236) Q.3@28.168,17.684 ; Q.3@27.94,17.431 27.94,19.746 R6.1@29.022,20.828 ; 27.958,19.764 cw(c29.022,18.701) R6.1@29.022,20.205 ; 28.2,20.006 ccw(c27.478,20.728) R6.1@28.499,20.728 ; R6.1@28.392,20.198 cw(c29.022,19.568) R6.1@29.022,20.459 ; R6.1@29.022,21.529 31.705,24.212 U4.4@34.925,24.212 ; R6.1@29.037,20.928 cw(c30.524,20.928) 29.473,21.98 ; R6.1@29.291,20.928 cw(c31.391,20.928) 29.906,22.413 ; R6.1@29.545,20.928 cw(c32.259,20.928) 30.34,22.847
NetR1_1: R1.1 R2.2 U3.7 | length 15.2
  Top Layer w0.508: R1.1@25.908,32.578 27.808,32.578 R2.2@28.956,31.43 33.208,31.43 34.036,32.258 U3.7@34.036,34.005 ; R1.1@26.288,32.298 cw(c26.964,31.622) 26.964,32.578 ; R1.1@26.288,32.858 ccw(c26.964,33.534) 26.964,32.578 ; 28.109,32.277 cw(c27.263,31.43) R2.2@28.46,31.43 ; R2.2@28.351,32.035 ccw(c28.856,32.541) R2.2@28.856,31.826 ; R2.2@29.336,31.15 cw(c30.012,30.474) 30.012,31.43 ; R2.2@29.336,31.71 ccw(c30.012,32.386) 30.012,31.43
NetR7_1: R7.1 R8.1 U4.25 | length 13.6
  Top Layer w0.254: U4.25@41.325,24.212 42.754,24.212 43.815,25.273 v1(43.815,26.416) ; v1@43.551,26.152 cw(c42.915,25.516) 43.815,25.516 cw(c44.715,25.516) v1@44.079,26.152
  Bottom Layer w0.254: v1(43.815,26.416) 44.77,26.416 ; R7.1@44.079,26.152 cw(c44.715,25.516) 44.715,26.416 cw(c44.715,27.316) R7.1@44.079,26.68 ; R7.1@44.188,26.687 ccw(c44.77,27.176) 44.77,26.416 ; R7.1@44.249,26.104 cw(c44.77,25.826) 44.77,26.416 ; R8.1@46.471,25.026 ccw(c45.847,24.561) 45.847,25.339 ; R8.1@46.471,25.652 cw(c45.847,26.117) 45.847,25.339 ; R8.1@46.797,25.146 R8.1@46.99,25.339 ; R8.1@46.929,25.4 R8.1@46.99,25.339 ; 44.77,26.416 45.847,25.339 ; 45.847,25.339 R8.1@46.99,25.339
NetR50_2: R50.2 U7.2 | length 5
  Top Layer w0.254: R50.2@61.468,57.338 62.423,57.338 ; R50.2@62.034,57.1 cw(c62.423,56.901) 62.423,57.338 ; R50.2@62.034,57.576 ccw(c62.423,57.775) 62.423,57.338 ; U7.2@65.024,56.246 63.515,56.246 62.423,57.338
NetR51_1: R51.1 U7.4 | length 6.4
  Top Layer w0.254: U7.4@67.424,55.596 70.394,55.596 R51.1@70.678,55.88 ; 68.971,55.596 ccw(c68.971,57.487) R51.1@70.308,56.15 ; 69.584,55.596 ccw(c69.584,56.874) R51.1@70.488,55.97 ; 69.86,55.596 cw(c69.86,54.962) R51.1@70.308,55.41
NetR101_1: R101.1 R102.2 U10.3 | length 23.1
  Top Layer w0.508: R101.1@63.5,75.118 R102.2@69.088,75.118 70.424,76.454 78.359,76.454 79.121,75.692 U10.3@79.121,74.403 ; R101.1@63.88,74.838 cw(c64.556,74.162) 64.556,75.118 cw(c64.556,76.074) R101.1@63.88,75.398 ; R102.2@68.708,74.838 ccw(c68.032,74.162) 68.032,75.118 ccw(c68.032,76.074) R102.2@68.708,75.398 ; R102.2@69.188,75.514 ccw(c69.188,76.229) R102.2@69.693,75.723 ; R102.2@69.584,75.118 cw(c70.781,75.118) 69.935,75.965 ; 78.817,75.996 cw(c78.075,75.253) U10.3@79.125,75.253
NetR105_2: R105.2 R106.2 U9.2 | length 22.7
  Top Layer w0.508: R106.2@108.138,90.424 116.774,90.424 R105.2@116.84,90.358 118.049,90.358 118.706,89.701 U9.2@118.706,82.335 ; R106.2@108.418,90.144 cw(c109.094,89.468) 109.094,90.424 cw(c109.094,91.38) R106.2@108.418,90.704 ; 115.625,90.424 cw(c115.625,89.243) R105.2@116.46,90.078 ; 115.943,90.424 ccw(c115.943,91.155) R105.2@116.46,90.638 ; R105.2@117.22,90.078 cw(c117.896,89.402) 117.896,90.358 cw(c117.896,91.314) R105.2@117.22,90.638
NetR110_1: R110.1 R111.2 U12.3 | length 18.3
  Top Layer w0.254: R111.2@99.728,78.58 R111.2@99.949,78.359
  Top Layer w0.508: R110.1@96.52,77.282 97.729,77.282 R111.2@99.822,78.674 99.822,78.867 103.251,82.296 105.156,82.296 106.172,83.312 U12.3@106.172,84.902 ; R110.1@96.9,77.002 cw(c97.576,76.326) 97.576,77.282 cw(c97.576,78.238) R110.1@96.9,77.562 ; 98.845,78.024 ccw(c98.211,78.978) R111.2@99.334,78.752 ; 99.068,78.173 cw(c99.493,77.534) R111.2@99.644,78.286 ; R111.2@100.318,78.674 cw(c101.981,78.674) 100.805,79.85
NetR150_1: R150.1 U10.7 | length 4.2
  Top Layer w0.508: R150.1@79.918,65.912 ccw(c78.776,67.054) 80.391,67.054 ; R150.1@80.198,65.532 80.391,65.725 U10.7@80.391,68.403
NetR150_2: R150.2 U11.2 | length 10.4
  Top Layer w0.254: R150.2@77.928,65.062 cw(c77.035,64.169) 78.298,64.169 cw(c79.561,64.169) R150.2@78.668,65.062 ; R150.2@78.298,65.532 78.298,60.117 79.629,58.786 U11.2@80.772,58.786 U11.2@80.757,58.801
NetR201_1: R201.1 U9.14 | length 5.3
  Top Layer w0.508: R201.1@119.708,72.858 ccw(c119.061,73.505) 119.976,73.505 ; R201.1@119.888,72.578 119.976,72.666 U9.14@119.976,76.335 ; 119.976,73.563 ccw(c120.973,73.563) R201.1@120.268,72.858
NetU5_102: U5.102 U5.106 | length 6
  Top Layer w0.254: U5.106@66.837,41.448 64.978,41.448 64.643,41.783 64.643,43.053 65.038,43.448 U5.102@66.837,43.448
NetU9_7: U9.7 U9.8 | length 6
  Top Layer w0.508: U9.8@112.356,76.335 U9.7@112.356,82.335
NetU12_6: U12.6 U12.7 | length 1.8
  Top Layer w0.254: U12.7@107.442,79.502 U12.7@107.569,80.01
  Top Layer w0.508: U12.6@106.172,79.502 U12.7@107.442,79.502
PU1: R22.1 U5.159 | length 11.8
  Top Layer w0.254: U5.159@82.087,26.198 82.087,23.577 85.41,20.254 R22.1@87.884,20.254 ; R22.1@87.414,19.884 ccw(c86.521,18.991) 86.521,20.254 ccw(c86.521,21.517) R22.1@87.414,20.624
PU2: R23.1 U5.161 | length 17.9
  Top Layer w0.254: U5.161@83.087,26.198 83.087,23.974 85.217,21.844 89.85,21.844 R23.1@90.424,21.27 ; 87.676,21.844 cw(c87.676,18.622) R23.1@89.954,20.9 ; 88.289,21.844 cw(c88.289,19.235) R23.1@90.134,21.08 ; 88.902,21.844 cw(c88.902,19.848) R23.1@90.313,21.259 ; 89.515,21.844 cw(c89.515,20.461) R23.1@90.493,21.439
RXD: COM.3 U8.8 | length 26
  Top Layer w0.254: U8.8@95.377,16.742 96.625,16.742 98.298,18.415 98.298,22.858 COM.3@107.823,32.383 ; COM.3@107.234,32.512 cw(c105.501,32.512) 106.726,31.286 cw(c107.952,30.061) COM.3@107.952,31.794 ; COM.3@107.488,32.512 cw(c106.368,32.512) 107.16,31.72 cw(c107.952,30.928) COM.3@107.952,32.048
SCIRXD: U5.157 U8.9 | length 13.7
  Top Layer w0.254: U5.157@81.087,26.198 81.087,22.926 87.271,16.742 U8.9@88.977,16.742
SCITXD: U5.155 U8.11 | length 16.1
  Top Layer w0.254: U5.155@80.087,26.198 80.087,21.513 86.158,15.442 U8.11@88.977,15.442
TCK: P4.9 P4.11 U5.136 | length 26.8
  Top Layer w0.254: U5.136@70.587,26.198 70.587,19.964 72.898,17.653 72.898,16.002 P4.9@74.168,14.732 P4.11@76.708,14.732 ; P4.9@73.545,14.732 ccw(c72.041,14.732) 73.104,15.796 ccw(c74.168,16.859) P4.9@74.168,15.355 ; P4.9@73.799,14.732 ccw(c72.908,14.732) 73.538,15.362 ccw(c74.168,15.992) P4.9@74.168,15.101 ; P4.9@74.429,14.471 cw(c75.059,13.841) 75.059,14.732 cw(c75.059,15.623) P4.9@74.429,14.993 ; P4.9@74.609,14.291 cw(c75.672,13.228) 75.672,14.732 cw(c75.672,16.236) P4.9@74.609,15.173 ; P4.11@76.267,14.291 ccw(c75.204,13.228) 75.204,14.732 ccw(c75.204,16.236) P4.11@76.267,15.173 ; P4.11@76.447,14.471 ccw(c75.817,13.841) 75.817,14.732 ccw(c75.817,15.623) P4.11@76.447,14.993
TDI: P4.3 U5.131 | length 39.6
  Top Layer w0.254: v1@58.664,22.215 cw(c58.028,21.579) 58.928,21.579 cw(c59.828,21.579) v1@59.192,22.215 ; v1(58.928,22.479) 58.928,15.113 60.96,13.081 65.532,13.081 66.548,14.097 P4.3@66.548,14.732 ; v1@64.633,27.188 ccw(c63.997,27.824) 64.897,27.824 ccw(c65.797,27.824) v1@65.161,27.188 ; v1(64.897,26.924) 64.897,28.575 65.27,28.948 U5.131@66.837,28.948 ; 65.85,13.399 ccw(c65.23,14.018) P4.3@66,14.435 ; 66.09,13.639 ccw(c65.542,14.187) P4.3@66.224,14.556 ; 66.331,13.88 ccw(c65.855,14.356) P4.3@66.447,14.677
  Bottom Layer w0.254: v1(58.928,22.479) 59.944,22.479 64.389,26.924 ; v1@59.192,22.215 cw(c59.828,21.579) 59.828,22.479 cw(c59.828,23.379) v1@59.192,22.743 ; 63.393,25.928 cw(c64.897,24.424) v1@64.897,26.551 ; 63.827,26.362 cw(c64.897,25.291) v1@64.897,26.805 ; 64.26,26.795 cw(c64.897,26.159) v1@64.897,27.059 ; v1@64.541,26.812 ccw(c64.389,26.765) 64.389,26.924 ; v1@64.541,27.036 cw(c64.389,27.083) 64.389,26.924 ; v1(64.897,26.924) 64.389,26.924
TDIRA: P2.2 R20.1 U5.116 | length 21.1
  Top Layer w0.254: R20.1@58.354,34.151 ccw(c58.354,35.508) 59.313,34.548 ; R20.1@58.354,34.405 ccw(c58.354,36.375) 59.747,34.982 ; R20.1@58.354,34.659 ccw(c58.354,37.242) 60.181,35.416 ; R20.1@58.735,34.036 58.801,34.036 P2.2@61.341,36.576 61.469,36.448 U5.116@66.837,36.448 ; P2.2@60.718,36.576 cw(c59.214,36.576) 60.277,35.512 cw(c61.341,34.449) P2.2@61.341,35.953 ; P2.2@60.972,36.576 cw(c60.081,36.576) 60.711,35.946 cw(c61.341,35.316) P2.2@61.341,36.207 ; P2.2@61.602,36.837 ccw(c62.541,37.776) 62.541,36.448 ; P2.2@61.782,36.135 cw(c62.536,35.381) 62.536,36.448 ; P2.2@61.782,37.017 ccw(c63.154,38.389) 63.154,36.448
  Bottom Layer w0.254: P2.2@61.275,36.51 P2.2@61.341,36.576
TDIRB: P3.2 R21.1 U5.71 | length 17.6
  Top Layer w0.254: P3.2@74.743,61.535 cw(c73.827,60.619) 75.123,60.619 ; R21.1@74.753,59.398 ccw(c73.86,60.291) 75.123,60.291 ccw(c76.386,60.291) R21.1@75.493,59.398 ; R21.1@74.81,58.409 cw(c74.345,57.785) 75.123,57.785 ; R21.1@75.057,58.994 R21.1@75.123,58.928 ; 75.123,60.325 cw(c76.835,60.325) P3.2@75.625,61.535 ; 75.123,60.938 cw(c76.222,60.938) P3.2@75.445,61.715 ; P3.2@75.184,61.976 75.123,61.915 75.123,57.785 ; R21.1@75.436,58.409 ccw(c75.901,57.785) 75.123,57.785 ; U5.71@77.587,52.198 77.587,55.321 75.123,57.785
TDO: P4.7 U5.127 | length 32.7
  Top Layer w0.254: U5.127@66.837,30.948 63.968,30.948 61.341,28.321 61.341,17.399 62.738,16.002 70.358,16.002 P4.7@71.628,14.732 ; P4.7@71.005,14.732 ccw(c69.501,14.732) 70.564,15.796 ccw(c71.628,16.859) P4.7@71.628,15.355 ; P4.7@71.259,14.732 ccw(c70.368,14.732) 70.998,15.362 ccw(c71.628,15.992) P4.7@71.628,15.101
TMS: P4.1 U5.126 | length 29.3
  Top Layer w0.254: P4.1@63.567,14.291 ccw(c62.504,13.228) 62.504,14.732 ccw(c62.504,16.236) P4.1@63.567,15.173 ; P4.1@63.747,14.471 ccw(c63.117,13.841) 63.117,14.732 ccw(c63.117,15.623) P4.1@63.747,14.993 ; P4.1@64.008,14.732 60.833,14.732 60.071,15.494 60.071,28.956 62.563,31.448 U5.126@66.837,31.448
TRSTN: C80.1 P4.2 R26.1 U5.135 | length 30.6
  Top Layer w0.254: P4.2@63.567,17.713 ccw(c62.504,18.776) 64.008,18.776 ccw(c65.512,18.776) P4.2@64.449,17.713 ; P4.2@63.747,17.533 ccw(c63.117,18.163) 64.008,18.163 ccw(c64.899,18.163) P4.2@64.269,17.533 ; P4.2@64.008,17.272 64.008,19.37 R26.1@66.04,21.402 68.121,21.402 70.087,23.368 U5.135@70.087,26.198 ; 64.976,20.338 ccw(c63.913,21.402) R26.1@65.417,21.402 ; 65.218,20.58 cw(c65.94,19.858) R26.1@65.94,20.879 ; R26.1@65.41,20.772 ccw(c64.78,21.402) R26.1@65.671,21.402 ; R26.1@66.51,21.032 cw(c67.403,20.139) 67.403,21.402 cw(c67.403,22.665) R26.1@66.51,21.772
  Bottom Layer w0.254: P4.2@63.567,17.713 ccw(c62.504,18.776) 64.008,18.776 ccw(c65.512,18.776) P4.2@64.449,17.713 ; C80.1@63.577,19.85 cw(c62.537,18.81) 64.008,18.81 ; P4.2@63.747,17.533 ccw(c63.117,18.163) 64.008,18.163 ccw(c64.899,18.163) P4.2@64.269,17.533 ; C80.1@63.757,20.03 cw(c63.15,19.423) 64.008,19.423 ; C80.1@63.947,20.32 64.008,20.259 P4.2@64.008,17.272 ; 64.008,19.105 cw(c65.062,19.105) C80.1@64.317,19.85
TXD: COM.2 U8.13 | length 34.8
  Top Layer w0.254: U8.13@88.977,14.142 91.231,14.142 92.329,15.24 92.329,17.018 97.155,21.844 97.155,24.485 COM.2@107.952,35.282 ; COM.2@107.234,35.282 cw(c105.501,35.282) 106.726,34.056 cw(c107.952,32.831) COM.2@107.952,34.564 ; COM.2@107.488,35.282 cw(c106.368,35.282) 107.16,34.49 cw(c107.952,33.698) COM.2@107.952,34.818
V+: C1.1 C3.2 C20.1 C21.2 D1.2 U1.1 U3.2 | length 114
  Top Layer w0.254: v1@33.899,41.265 cw(c33.569,40.935) 34.036,40.935 cw(c34.757,40.935) v1@34.247,41.445 ; U3.2@33.942,41.089 ccw(c33.715,41.316) 34.036,41.316 ccw(c34.357,41.316) U3.2@34.13,41.089 ; U3.2@34.036,40.005 34.036,41.402 v1(34.163,41.529) ; U3.2@34.036,40.322 cw(c35.37,40.322) v1@34.427,41.265
  Top Layer w2: C20.1@19.812,46.736 19.431,47.117 19.431,86.487 26.416,93.472 D1.2@26.416,97.178 ; 27.894,96.566 ccw(c26.416,95.087) D1.2@26.416,97.178 ; U1.1@43.942,76.234 41.114,76.234 31.496,85.852 C1.1@31.496,92.964 27.282,97.178 D1.2@26.416,97.178
  Bottom Layer w0.5: C21.2@34.036,41.529 v1(34.163,41.529)
  Bottom Layer w0.508: C3.2@43.474,73.532 ccw(c42.344,74.662) 43.942,74.662 ; U1.1@43.556,75.648 cw(c42.624,74.716) 43.942,74.716 cw(c45.26,74.716) U1.1@44.328,75.648 ; C3.2@43.754,73.152 43.942,73.34 U1.1@43.942,76.234
  Bottom Layer w1.27: C20.1@19.812,46.736 19.812,44.45 22.733,41.529 v1(34.163,41.529)
V-: C2.2 C4.1 D2.1 U2.4 | length 48.8
  Top Layer w2: D2.1@25.4,54.714 25.4,54.864 36.195,65.659 U2.4@46.083,65.659 ; U2.4@43.643,63.219 ccw(c37.754,57.33) 37.754,65.659 ccw(c37.754,73.988) U2.4@43.643,68.099
  Bottom Layer w0.508: C2.2@34.024,63.5 cw(c35.062,63.5) 34.328,64.234 ; C2.2@34.036,63.5 34.036,63.942 C4.1@38.166,68.072 ; C2.2@34.532,63.5 cw(c36.797,63.5) 35.195,65.101 ; 37.319,67.225 cw(c38.166,66.379) C4.1@38.166,67.576 ; C4.1@37.561,67.467 ccw(c37.055,67.972) C4.1@37.77,67.972
VDD3VFL: C32.1 C33.2 R9.2 U5.69 | length 28.8
  Top Layer w0.254: v1@78.349,49.921 ccw(c77.775,50.495) 78.587,50.495 ; v1@78.587,49.556 U5.69@78.587,52.198 ; 78.587,50.62 ccw(c79.576,50.62) v1@78.877,49.921
  Bottom Layer w0.254: C32.1@75.692,45.212 R9.2@78.806,45.212 78.613,45.405 v1(78.613,49.657) ; C32.1@76.021,44.883 cw(c76.815,44.089) 76.815,45.212 cw(c76.815,46.335) C32.1@76.021,45.541 ; C32.1@76.2,44.704 cw(c77.428,43.476) 77.428,45.212 cw(c77.428,46.948) C32.1@76.2,45.72 ; C32.1@76.38,44.524 cw(c78.041,42.863) 78.041,45.212 cw(c78.041,47.561) C32.1@76.38,45.9 ; C33.2@78.27,49.48 cw(c77.443,48.653) 78.613,48.653 ; C33.2@78.349,49.393 cw(c77.713,48.757) 78.613,48.757 cw(c79.513,48.757) C33.2@78.877,49.393 ; R9.2@78.436,44.842 ccw(c77.543,43.949) 77.543,45.212 ccw(c77.543,46.475) R9.2@78.436,45.582 ; R9.2@78.436,45.682 ccw(c78.009,46.109) 78.613,46.109 ; 78.613,46.427 ccw(c79.921,46.427) R9.2@78.996,45.502 ; 78.613,47.041 ccw(c80.535,47.041) R9.2@79.176,45.682 ; 78.613,48.522 cw(c79.968,48.522) C33.2@79.01,49.48 ; 78.613,49.135 cw(c79.355,49.135) C33.2@78.83,49.66
VDD5: C23.1 C25.1 C26.2 C27.2 D3.1 D4.1 L1.2 R1.2 R3.2 R6.2 U4.5 U4.6 U4.11 U4.12 | length 99.2
  Top Layer w0.254: C27.2@32.004,18.73 32.936,19.662 ; C27.2@32.104,19.253 ccw(c32.104,20.274) 32.826,19.552 ; C27.2@32.115,18.719 cw(c32.821,18.013) 32.821,19.012 ; C27.2@32.286,19.012 U4.12@34.925,19.012 ; C27.2@32.294,18.54 cw(c33.434,17.4) 33.434,19.012 ; C27.2@32.372,18.758 cw(c33.019,18.825) C27.2@32.559,19.285 ; C27.2@32.474,18.36 cw(c34.047,16.787) U4.12@34.047,19.012 ; v2@32.62,23.443 ccw(c32.752,23.895) 33.085,23.562 ; C27.2@32.624,18.784 cw(c33.702,18.895) 32.936,19.662 ; v2@32.658,23.135 ccw(c33.195,23.672) 33.195,22.912 ; v2@32.837,22.596 cw(c33.6,21.833) 33.6,22.912 ; v2@32.837,23.314 ccw(c33.808,24.286) 33.808,22.912 ; v2@32.966,23.097 cw(c33.418,23.229) 33.085,23.562 ; U4.6@34.882,22.955 U4.6@34.925,22.912 32.521,22.912 v2(32.478,22.955) 33.085,23.562 ; U4.11@34.925,19.662 32.936,19.662 ; U4.5@34.925,23.562 33.085,23.562 ; C23.1@40.386,38.481 C23.1@40.386,38.862 ; R3.2@47.056,42.545 R3.2@47.498,42.987 R3.2@47.506,42.995
  Top Layer w0.508: R1.2@25.628,34.758 ccw(c24.952,35.434) 25.908,35.434 ccw(c26.864,35.434) R1.2@26.188,34.758 ; D3.1@25.639,36.434 cw(c24.988,35.783) 25.908,35.783 cw(c26.828,35.783) D3.1@26.177,36.434 ; D3.1@25.663,36.439 cw(c25.073,35.849) 25.908,35.849 cw(c26.743,35.849) D3.1@26.153,36.439 ; R1.2@25.908,34.478 D3.1@25.908,37.084 ; R6.2@30.651,20.44 cw(c30.061,19.812) 30.922,19.812 ; 31.157,19.577 cw(c30.311,18.73) C27.2@31.508,18.73 ; R6.2@31.193,20.44 ccw(c31.783,19.812) 30.922,19.812 ; R6.2@31.318,20.928 cw(c33.412,20.928) 31.931,22.408 ; C27.2@31.399,19.335 ccw(c31.904,19.841) C27.2@31.904,19.126 ; C27.2@32.004,18.73 30.922,19.812 ; v2@32.097,22.955 cw(c31.177,22.955) 31.827,22.305 cw(c32.478,21.654) v2@32.478,22.574 ; v2(32.478,22.955) 30.922,21.399 30.922,19.812 ; R3.2@47.498,43.172 R3.2@47.498,42.987 R3.2@47.506,42.995
  Top Layer w1.27: v2(39.624,37.592) cw(c41.77,35.446) 41.77,38.481 ; C23.1@40.386,38.481 42.291,38.481 43.688,39.878 D4.1@43.688,42.164 44.511,42.987 R3.2@47.498,42.987 ; C23.1@40.715,38.152 cw(c41.509,37.358) 41.509,38.481 cw(c41.509,39.604) C23.1@40.715,38.81 ; D4.1@44.053,42.164 cw(c44.934,42.164) 44.311,42.787 ; D4.1@44.063,42.189 cw(c45.99,40.262) 45.99,42.987 ; R3.2@47.506,42.995 L1.2@47.506,48.641
  Bottom Layer w0.254: v2(25.908,36.703) v2@26.035,36.576 ; C26.2@30.927,24.892 C26.2@30.927,25.146
  Bottom Layer w0.5: 29.718,27.813 30.292,27.813 ; C26.2@30.927,24.506 C26.2@30.927,24.892
  Bottom Layer w1.27: 31.402,23.081 ccw(c32.02,23.699) v2(32.478,22.955) 31.528,22.955 30.927,23.556 C26.2@30.927,25.146 29.718,26.355 29.718,27.813 25.908,31.623 v2(25.908,36.703) 38.735,36.703 v2(39.624,37.592) cw(c37.478,39.738) 37.478,36.703
"X1 CLKIN": R51.2 U5.77 | length 5.9
  Top Layer w0.254: R51.2@72.578,55.88 73.406,55.88 ; R51.2@73.05,55.655 cw(c73.406,55.486) 73.406,55.88 ; R51.2@73.05,56.105 ccw(c73.406,56.274) 73.406,55.88 ; U5.77@74.587,52.198 74.587,54.699 73.406,55.88
XMP/MCN: P5.1 R54.2 U5.17 | length 34.6
  Top Layer w0.254: U5.17@92.837,36.448 95.122,36.448 95.885,37.211 95.885,42.164 96.327,42.606 ; P5.1@94.555,57.979 cw(c93.492,56.916) 94.996,56.916 cw(c96.5,56.916) P5.1@95.437,57.979 ; P5.1@94.735,58.159 cw(c94.105,57.529) 94.996,57.529 cw(c95.887,57.529) P5.1@95.257,58.159 ; P5.1@94.996,58.42 94.996,51.689 98.806,47.879 98.806,43.053 98.359,42.606 ; R54.2@96.875,42.314 ccw(c96.327,41.946) 96.327,42.606 ; R54.2@96.875,42.898 cw(c96.327,43.266) 96.327,42.606 ; R54.2@97.976,42.37 cw(c98.359,42.177) 98.359,42.606 ; R54.2@97.976,42.842 ccw(c98.359,43.035) 98.359,42.606 ; 96.327,42.606 98.359,42.606
XRSN: C34.2 D6.1 R10.2 S.1 U4.22 U4.28 U5.160 | length 109.9
  Top Layer w0.254: S.1@38.735,15.24 S.1@38.989,14.986 ; U4.22@41.325,22.262 43.331,22.262 R10.2@44.069,21.524 46.04,21.524 v1(46.99,20.574) ; U4.28@41.325,26.162 41.325,26.847 42.164,27.686 49.403,27.686 v1(51.689,25.4) ; R10.2@43.462,21.653 ccw(c42.792,21.823) 43.281,22.312 ccw(c43.923,22.953) R10.2@43.952,22.047 ; R10.2@44.539,21.154 cw(c45.432,20.261) 45.432,21.524 cw(c45.432,22.787) R10.2@44.539,21.894 ; v1@46.617,20.574 ccw(c45.717,20.574) 46.353,21.211 ccw(c46.99,21.847) v1@46.99,20.947 ; v1@51.316,25.4 ccw(c50.416,25.4) 51.052,26.037 ccw(c51.689,26.673) v1@51.689,25.773 ; v1@81.788,29.218 cw(c81.788,28.318) 82.425,28.954 cw(c83.061,29.591) v1@82.161,29.591 ; v1(81.788,29.591) 82.587,28.792 U5.160@82.587,26.198
  Bottom Layer w0.254: S.1@38.548,15.427 ccw(c37.485,16.49) 38.989,16.49 ccw(c40.493,16.49) S.1@39.43,15.427 ; S.1@38.728,15.247 ccw(c38.098,15.877) 38.989,15.877 ccw(c39.88,15.877) S.1@39.25,15.247 ; S.1@38.989,14.986 38.989,16.891 42.672,20.574 v1(46.99,20.574) ; 45.427,20.574 cw(c45.427,18.669) C34.2@46.774,20.016 ; 46.041,20.574 cw(c46.041,19.283) C34.2@46.954,20.196 ; 46.335,20.574 ccw(c46.335,21.195) C34.2@46.774,20.756 ; C34.2@46.726,20.31 ccw(c46.09,19.674) 46.09,20.574 ccw(c46.09,21.474) C34.2@46.726,20.838 ; C34.2@47.534,20.196 cw(c48.288,19.442) 48.288,20.508 ; C34.2@47.625,20.508 54.417,20.508 62.357,28.448 69.977,28.448 71.12,29.591 v1(81.788,29.591) ; C34.2@47.714,20.016 cw(c48.901,18.829) 48.901,20.508 ; C34.2@47.714,20.756 ccw(c48.312,21.354) 48.312,20.508 ; v1@51.425,25.136 cw(c50.789,24.5) 51.689,24.5 cw(c52.589,24.5) v1@51.953,25.136 ; 51.689,20.508 v1(51.689,25.4) ; v1@81.524,29.327 ccw(c80.888,28.691) 80.888,29.591 ccw(c80.888,30.491) v1@81.524,29.855
  Bottom Layer w0.508: S.1@38.638,14.635 cw(c37.792,13.789) 38.989,13.789 cw(c40.186,13.789) S.1@39.34,14.635 ; S.1@38.989,15.621 38.989,11.43 40.894,9.525 D6.1@42.164,9.525 ; D6.1@41.519,9.28 ccw(c40.929,8.69) 40.929,9.525 ccw(c40.929,10.36) D6.1@41.519,9.77
pads on no net: COM.1 COM.4 COM.6 COM.7 COM.8 COM.9 P4.6 S.3 S.4 U3.5 U4.1 U4.2 U4.7 U4.8 U4.13 U4.14 U4.15 U4.16 U4.20 U4.21 U4.26 U4.27 U5.3 U5.4 U5.5 U5.6 U5.7 U5.8 U5.9 U5.18 U5.20 U5.21 U5.22 U5.24 U5.25 U5.26 U5.27 U5.28 U5.29 U5.30 U5.33 U5.34 U5.35 U5.36 U5.39 U5.40 U5.41 U5.42 U5.43 U5.44 U5.45 U5.46 U5.47 U5.48 U5.49 U5.50 U5.51 U5.53 U5.54 U5.55 U5.60 U5.61 U5.62 U5.63 U5.65 U5.66 U5.67 U5.68 U5.72 U5.73 U5.74 U5.76 U5.79 U5.80 U5.82 U5.83 U5.84 U5.85 U5.87 U5.88 U5.89 U5.90 U5.91 U5.92 U5.93 U5.94 U5.95 U5.96 U5.97 U5.98 U5.101 U5.103 U5.104 U5.107 U5.108 U5.109 U5.110 U5.111 U5.115 U5.118 U5.119 U5.121 U5.122 U5.123 U5.124 U5.125 U5.130 U5.132 U5.133 U5.138 U5.139 U5.140 U5.141 U5.144 U5.147 U5.148 U5.149 U5.150 U5.151 U5.152 U5.156 U5.158 U5.164 U5.167 U5.168 U5.169 U5.170 U5.171 U5.172 U5.173 U5.174 U6.1 U7.1 U8.10 U9.9 U9.10 U9.12 U9.13 U10.8 U11.1

## Polygon pours and split planes (outlines as drawn)
AGND on Bottom Layer (hatched 90Degree grid 0.2 track 0.254, remove dead copper): 39.878,98.933 123.952,98.933 123.952,66.167 122.391,66.167 105.246,49.022 105.246,29.845 97.409,21.844 81.153,21.844 81.153,24.003 99.187,40.9 99.187,59.055 81.026,66.04 66.929,66.04 59.055,58.166 40.005,58.166
DGND on Bottom Layer (hatched 90Degree grid 0.2 track 0.254, remove dead copper): 17.78,98.679 17.018,98.679 17.018,6.985 123.952,6.985 123.952,65.024 123.063,65.024 106.426,48.387 106.426,29.019 98.073,20.666 79.883,20.666 79.883,24.419 97.79,40.894 98.171,41.275 98.171,58.166 80.899,64.77 67.056,64.77 58.873,56.587 38.608,56.587 38.608,98.933 17.018,98.933 17.018,98.679

## Keep-outs
Keep-Out Layer:
  lines w0.254: 16.002,5.969 16.002,7.112 16.002,99.695 16.129,99.822 124.841,99.822 124.841,6.604 124.841,5.969 16.002,5.969

## Silkscreen, mask and mechanical layers (free items; w line width, h text height)
Top Overlay:
  circle w0.203: c26.67,81.28 r1.27
  circle w0.203: c26.67,76.2 r1.27
  circle w0.203: c26.67,71.12 r1.27
  lines w0.203: 19.897,69.85 17.145,69.215 ; 19.897,72.39 17.145,73.025 ; 19.897,74.93 17.145,74.295 ; 19.897,77.47 17.145,78.105 ; 19.897,80.01 17.145,79.375 ; 19.897,82.55 17.145,83.185 ; 20.32,68.792 20.32,83.608 ; 24.553,68.792 24.553,83.608 ; 25.612,71.755 27.305,70.062 ; 25.612,76.835 27.305,75.142 ; 25.612,81.915 27.305,80.222 ; 26.035,72.178 27.728,70.485 ; 26.035,77.258 27.728,75.565 ; 26.035,82.338 27.728,80.645 ; 17.145,69.215 17.145,73.025 ; 17.145,69.215 19.897,69.215 19.897,73.025 17.145,73.025 ; 17.145,74.295 17.145,78.105 ; 17.145,74.295 19.897,74.295 19.897,78.105 17.145,78.105 ; 17.145,79.375 17.145,83.185 ; 17.145,79.375 19.897,79.375 19.897,83.185 17.145,83.185 ; 16.722,68.792 16.722,83.608 28.998,83.608 28.998,68.792 16.722,68.792
  text "INPUT" at 80.772,96.266 h1.52
  text "+12V" at 30.734,81.28 h1.52
  text "-" at 80.264,81.026 h1.52
  text "+" at 85.09,81.026 h1.52
  text "GND" at 30.988,75.565 h1.52
  text "-12V" at 30.48,70.358 h1.52
  text "Of Technology" at 123.698,69.977 h1.52 r90
  text "Jiang Peng" at 119.507,50.546 h1.52 r90
  text "Hefei University" at 123.444,45.339 h1.52 r90
Mechanical 1:
  the board outline again, w0.254

## Text inside footprints (layer, text, board x,y; h text height)
COM: Top Overlay "6" at 113.897,37.167 h1.5 r270; Top Overlay "9" at 113.897,28.857 h1.5 r270; Top Overlay "5" at 104.497,27.472 h1.5 r270; Top Overlay "1" at 104.497,38.302 h1.5 r270
D10: Top Overlay "3" at 100.465,84.795 h1.5; Top Overlay "1" at 100.465,82.349 h1.5
P4: Top Overlay "13" at 81.28,14.224 h1.27; Top Overlay "14" at 81.28,16.764 h1.27; Top Overlay "1" at 60.96,14.224 h1.27; Top Overlay "2" at 60.96,16.764 h1.27
U1: Top Overlay "2" at 48.768,79.756 h1.1; Top Overlay "1" at 43.688,79.756 h1.1